# Altium PCB ArduinoNano_IoT_shield_MRF24J40MA.PcbDoc
Units mil, origin at the board's own origin, x right, y up, seen from the top; angles counter-clockwise.
Board outline 1590 x 2520 mil, 2 copper layers (Top Layer, Bottom Layer); 8 components, 31 nets, 82 pads, 10 vias.
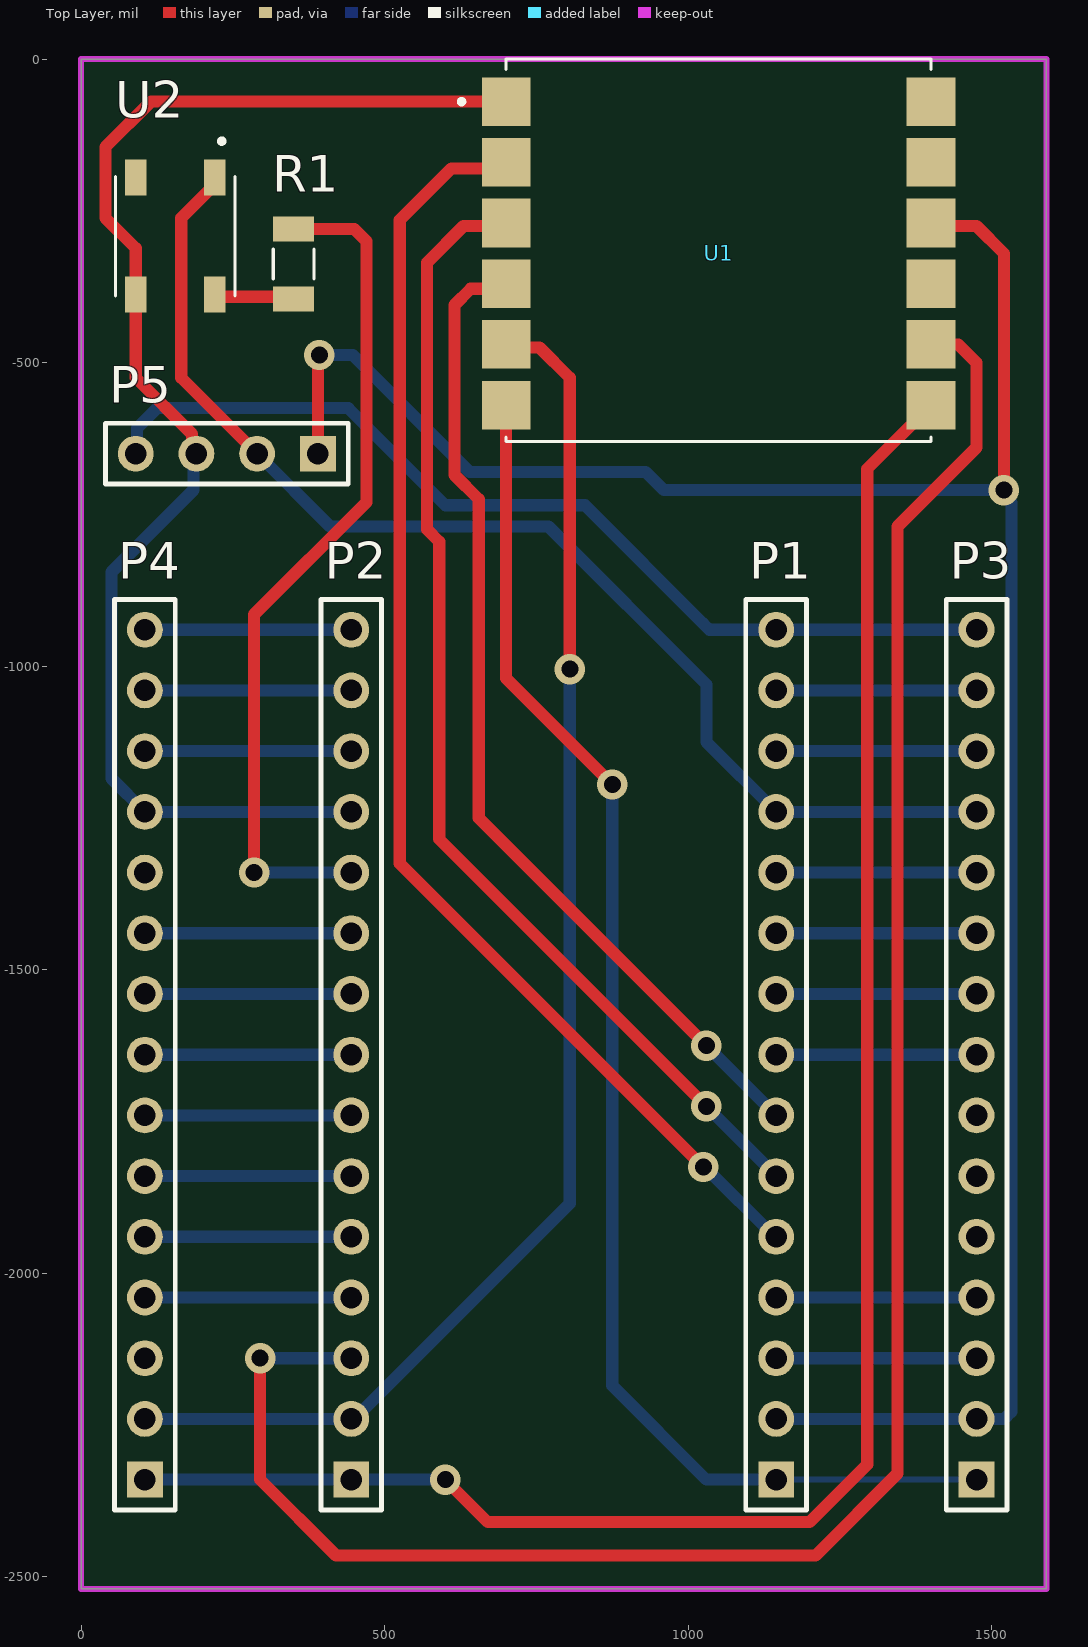
[diagram p0: Top Layer view]
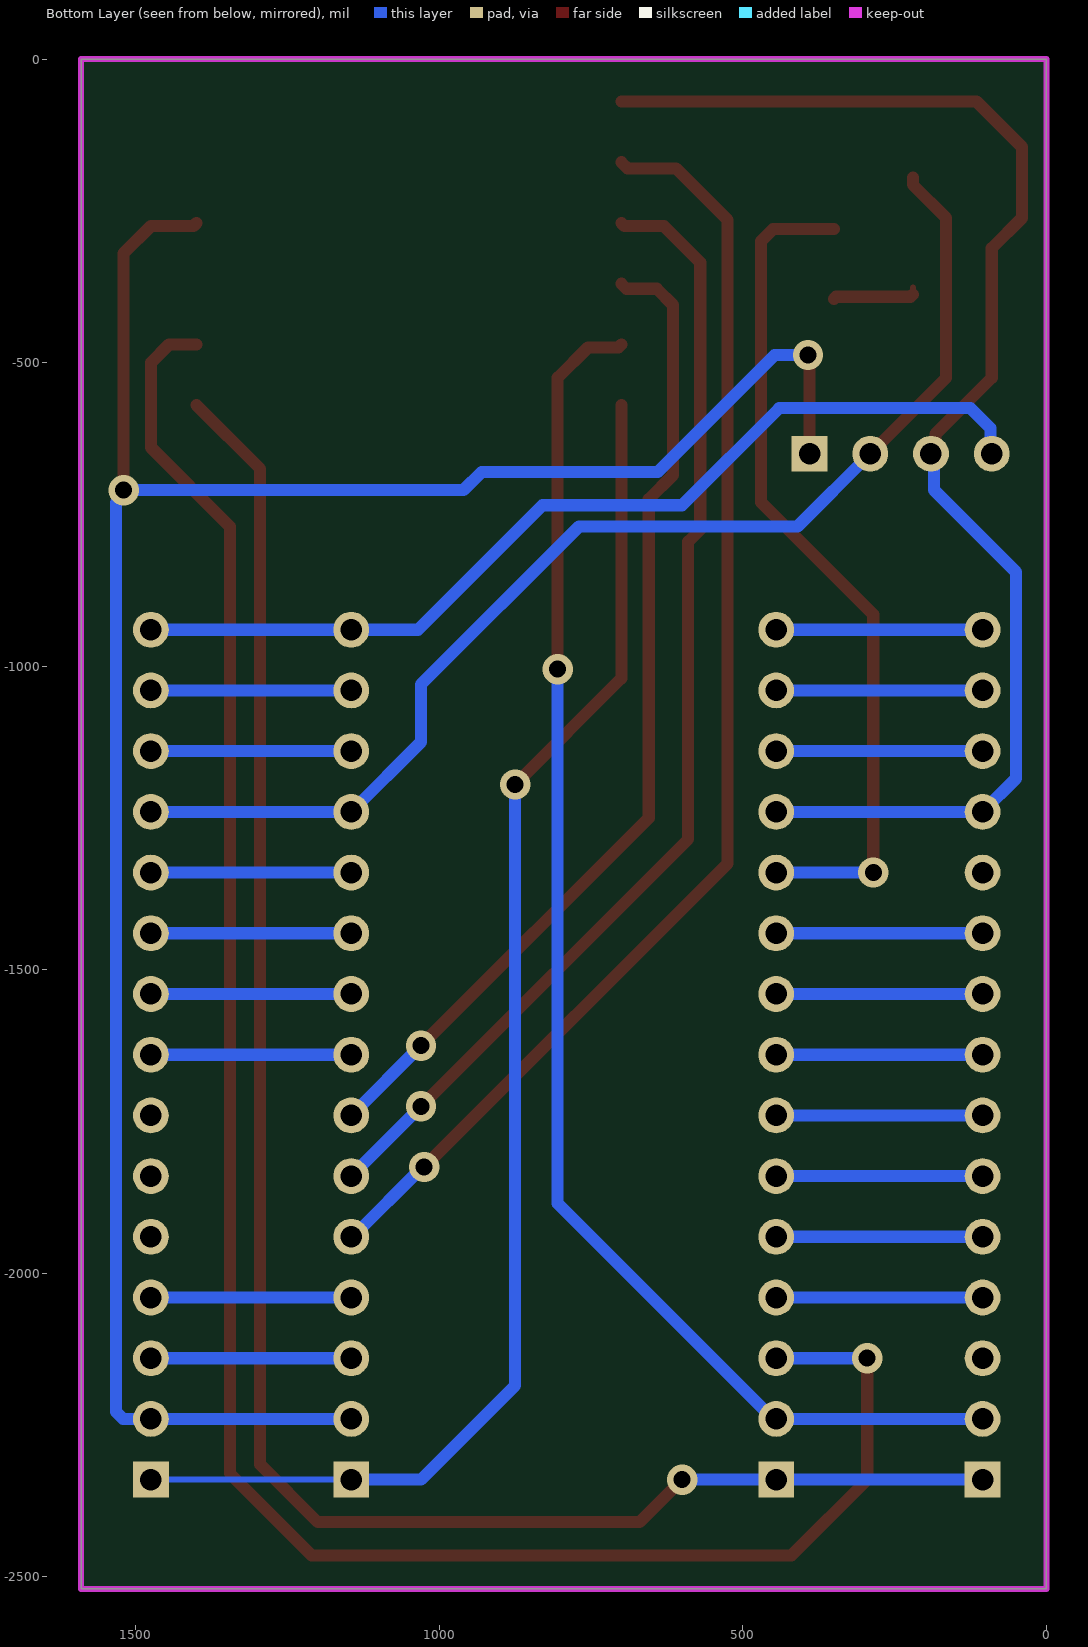
[diagram p1: Bottom Layer view, seen from below]

## Layer stack, top to bottom
Top Solder: solder mask 0.4, Solder Resist, Dk 3.5
Top Layer: signal copper 1.4
Dielectric 1: dielectric 12.6, FR-4, Dk 4.8
Bottom Layer: signal copper 1.4
Bottom Solder: solder mask 0.4, Solder Resist, Dk 3.5

## Board outline
0,0 1590,0 1590,-2520 0,-2520

## Design rules (kind name [scope] priority, off if disabled: settings)
Clearance [All] p1: gap=10 ignorepadtopadclearanceinfootprint=FALSE except(0: Arc-Hole Track-Hole SMDPad-Hole THPad-Hole Via-Hole Fill-Hole Poly-Hole Region-Hole Text-Hole)
PolygonConnect [All] p1: connectstyle=Relief reliefconductorwidth=10 reliefentries=4 polygonreliefangle="90 Angle" airgapwidth=10
RoutingVias [All] p1: holewidth=28 width=50 viastyle="Through Hole" minholewidth=28 minwidth=50 maxholewidth=28 maxwidth=50
SolderMaskExpansion [All] p1: expansion=4 istentingtop=FALSE
Width [All] p1: maxlimit=50 minlimit=10 preferedwidth=20 minimp=50.000000 maximp=50.000000 favimp=50.000000
30 further rules are at their usual default settings.

## Components (designator, comment, footprint, x,y, rotation, side; value= is the part's Value field where it differs from the comment)
P1 "Header 15" HDR1X15 1145,-2340 r90 top
P2 "Header 15" HDR1X15 445,-2340 r90 top
P3 "Header 15" HDR1X15 1475,-2340 r90 top
P4 "Header 15" HDR1X15 105,-2340 r90 top
P5 "Header 4" HDR1X4 390,-650 r180 top
R1 "330" RESC3115X65N 350,-337.52 r270 top
U1 "MRF24J40MA" MODULE_MRF24J40MA 1050,-315 r0 top
U2 "WS2812B-B" LED_WS2812B-B 154.96,-291.46 r270 top

## Footprints (in the part's own frame and the unit in brackets; to place one, negate y for a bottom-side part, rotate by r counter-clockwise, add the part's x,y. Pads: shape width x height; smd on the part's side, far side on the other; paste and mask are expansions set on the pad)
HDR1X4 [mm] "Connector; Header; 4 Position"
  rect 1.5x1.5 hole 0.9: 1(0,0)
  round 1.5 hole 0.9: 2(2.54,0) 3(5.08,0) 4(7.62,0)
  silkscreen extent -1.27,-1.27 8.89,1.27
HDR1X15 [mm] "Connector; Header; 15 Position"
  rect 1.5x1.5 hole 0.9: 1(0,0)
  round 1.5 hole 0.9: 2(2.54,0) 3(5.08,0) 4(7.62,0) 5(10.16,0) 6(12.7,0) 7(15.24,0) 8(17.78,0) 9(20.32,0) 10(22.86,0) 11(25.4,0) 12(27.94,0) 13(30.48,0) 14(33.02,0) 15(35.56,0)
  silkscreen extent -1.27,-1.27 36.83,1.27
LED_WS2812B-B [mm]
  rect 1.5x0.9 smd: 1(-2.45,1.65) 2(-2.45,-1.65) 3(2.45,-1.65) 4(2.45,1.65)
  silkscreen extent -4.07,-2.5 2.5,2.5
MODULE_MRF24J40MA [mil]
  rect 80x80 smd: 1(-350,245) 2(-350,145) 3(-350,45) 4(-350,-55) 5(-350,-155) 6(-350,-255) 7(350,-255) 8(350,-155) 9(350,-55) 10(350,45) 11(350,145) 12(350,245)
  silkscreen extent -427,-315 350,315
RESC3115X65N [mm]
  rect 1.05x1.72 smd: 1(-1.46,0) 2(1.46,0)
  silkscreen extent -0.62,-0.85 0.62,0.85

## Part data
P1 P2 P3 P4: "Header, 15-Pin", LatestRevisionDate=17-Jul-2002, LatestRevisionNote="Re-released for DXP Platform.", Publisher="Altium Limited"
P5: "Header, 4-Pin", LatestRevisionDate=17-Jul-2002, LatestRevisionNote="Re-released for DXP Platform.", Publisher="Altium Limited"
R1: library part 2-2176343-5, "Fixed Resistor CRGCQ 1206 1K0 1%", Package=None, Availability=Unavailable, MF="{'manufacturer': u'TE Connectivity'}", MP=2-2176343-5, Price=None
U1: "802.15.4 Zigbee Transceiver Module 2.4GHz Integrated, Trace Surface Mount", Package=None, Availability=Unavailable, MF="{'manufacturer': u'Microchip'}", MP=MRF24J40MA, Price=None
U2: "Intelligent control LED integrated light source", Package=None, Availability=Unavailable, MF="{'manufacturer': u'Worldsemi'}", MP=WS2812B-B, Price=None

## Via types
v1: diameter 50, hole 28, Top Layer to Bottom Layer, 10 vias

## Nets (pads, with @x,y where several pads share a name; then routed paths per layer and width w, separated by ;. In a path a pad name is that pad's centre, name@x,y a point inside that pad or via, vN(x,y) a via of type N, cw(c..) or ccw(c..) an arc to the next point about the centre after c; other vN are vias at no path point)
3.3V: P1.2 P3.2 P5.1 U1.10 | length 3829.6
  Top Layer w20: P5.1 390,-490 v1(392.5,-487.5) ; U1.10 1405,-275 1475,-275 1520,-320 v1(1520,-710)
  Bottom Layer w20: v1(392.5,-487.5) 447.5,-487.5 640,-680 930,-680 960,-710 v1(1520,-710) 1520,-718.12 1532.43,-730.54 1532.43,-2228.28 1520.71,-2240 P3.2 P1.2
5V: P1.12 P3.12 P5.2 U2.1 | length 2014.6
  Top Layer w20: U2.1 219.92,-206.81 165,-261.73 165,-525 P5.2
  Bottom Layer w20: P5.2 410,-770 770,-770 1030,-1030 1030,-1125 P1.12 P3.12
CS: P2.3 U1.8 | length 3484
  Top Layer w10: P2.3@440,-2140 P2.3
  Top Layer w20: v1(295,-2140) 295,-2340 420,-2465 1210,-2465 1345,-2330 1345,-770 1475,-640 1475,-500 1445,-470 U1.8
  Bottom Layer w20: v1(295,-2140) P2.3
GND2: P2.12 P4.12 P5.3 U1.1 U2.3 | length 2269
  Top Layer w20: P5.3 182.53,-642.53 182.53,-617.53 90,-525 U2.3 90,-311.69 40,-261.69 40,-145 115,-70 U1.1
  Bottom Layer w20: P5.3 185,-655 185,-710 50,-845 50,-1185 P4.12 P2.12
INT: P1.7 U1.4 | length 1654
  Top Layer w20: U1.4 691.72,-378.28 641.72,-378.28 615,-405 615,-685 655,-725 655,-1250 v1(1030,-1625)
  Bottom Layer w20: v1(1030,-1625) P1.7
NetP1_3: P1.3 P3.3 | length 330
  Bottom Layer w20: P1.3 P3.3
NetP1_4: P1.4 P3.4 | length 330
  Bottom Layer w20: P1.4 P3.4
NetP1_8: P1.8 P3.8 | length 330
  Bottom Layer w20: P1.8 P3.8
NetP1_9: P1.9 P3.9 | length 330
  Bottom Layer w20: P1.9 P3.9
NetP1_10: P1.10 P3.10 | length 330
  Bottom Layer w20: P1.10 P3.10
NetP1_11: P1.11 P3.11 | length 330
  Bottom Layer w20: P1.11 P3.11
NetP1_13: P1.13 P3.13 | length 330
  Bottom Layer w20: P1.13 P3.13
NetP1_14: P1.14 P3.14 | length 337.1
  Top Layer w10: P1.14 P1.14@1150,-1035
  Bottom Layer w20: P1.14 P3.14
NetP2_4: P2.4 P4.4 | length 340
  Bottom Layer w20: P4.4 P2.4
NetP2_5: P2.5 P4.5 | length 340
  Bottom Layer w20: P4.5 P2.5
NetP2_6: P2.6 P4.6 | length 340
  Bottom Layer w20: P4.6 P2.6
NetP2_7: P2.7 P4.7 | length 340
  Bottom Layer w20: P4.7 P2.7
NetP2_8: P2.8 P4.8 | length 340
  Bottom Layer w20: P4.8 P2.8
NetP2_9: P2.9 P4.9 | length 340
  Bottom Layer w20: P4.9 P2.9
NetP2_10: P2.10 P4.10 | length 340
  Bottom Layer w20: P4.10 P2.10
NetP2_13: P2.13 P4.13 | length 340
  Bottom Layer w20: P4.13 P2.13
NetP2_14: P2.14 P4.14 | length 340
  Bottom Layer w20: P4.14 P2.14
NetP2_15: P2.15 P4.15 | length 340
  Bottom Layer w20: P4.15 P2.15
NetR1_2: R1.2 U2.4 | length 144.8
  Top Layer w10: U2.4 U2.4@219.92,-376.1
  Top Layer w20: U2.4 223.46,-391.46 346.46,-391.46 R1.2
RESET: P1.5 U1.2 | length 2149.1
  Top Layer w20: U1.2 690,-180 610,-180 525,-265 525,-1325 v1(1025,-1825)
  Bottom Layer w20: v1(1025,-1825) 1027.5,-1825 1142.5,-1940 P1.5
RGB: P2.11 R1.1 | length 1404.9
  Top Layer w20: v1(285,-1340) 285,-915 470,-730 470,-300 450.04,-280.04 R1.1
  Bottom Layer w20: v1(285,-1340) P2.11
SCK: P1.1 P3.1 U1.6 | length 2351.7
  Top Layer w20: U1.6 700,-1020 v1(875,-1195)
  Bottom Layer w10: P1.1 P3.1
  Bottom Layer w20: v1(875,-1195) 875,-2185 1030,-2340 P1.1
SDI: P2.2 P4.2 U1.5 | length 2334.8
  Top Layer w20: U1.5 705,-475 755,-475 805,-525 v1(805,-1005)
  Bottom Layer w20: P4.2 P2.2 450,-2240 805,-1885 v1(805,-1005)
SDO: P2.1 P4.1 U1.7 | length 3046.8
  Top Layer w20: v1(600,-2340) 670,-2410 1200,-2410 1295,-2315 1295,-675 U1.7
  Bottom Layer w20: P4.1 P2.1 v1(600,-2340)
VIN: P1.15 P3.15 P5.4 | length 1590.7
  Bottom Layer w20: P5.4 92.09,-647.91 92.09,-607.91 125,-575 440,-575 600,-735 830,-735 1025.03,-930.03 1035,-940 P1.15 P3.15
WAKE: P1.6 U1.3 | length 1900.1
  Top Layer w20: U1.3 695,-275 630,-275 570,-335 570,-775 590,-795 590,-1285 v1(1030,-1725)
  Bottom Layer w20: v1(1030,-1725) P1.6
pads on no net: P3.5 P3.6 P3.7 P4.3 P4.11 U1.9 U1.11 U1.12 U2.2

## Keep-outs
Keep-Out Layer:
  the board outline again, w10

## Text inside footprints (layer, text, board x,y; h text height)
U1: Mechanical 13 "PCB Edge" at 1425.98,20.87 h50